# Altium PCB INA128仪放.PcbDoc
Units mil, origin at the board's own origin, x right, y up, seen from the top; angles counter-clockwise.
Board outline 2390.08 x 2410 mil, 2 copper layers (Top Layer, Bottom Layer); 27 components, 18 nets, 80 pads, 4 vias.
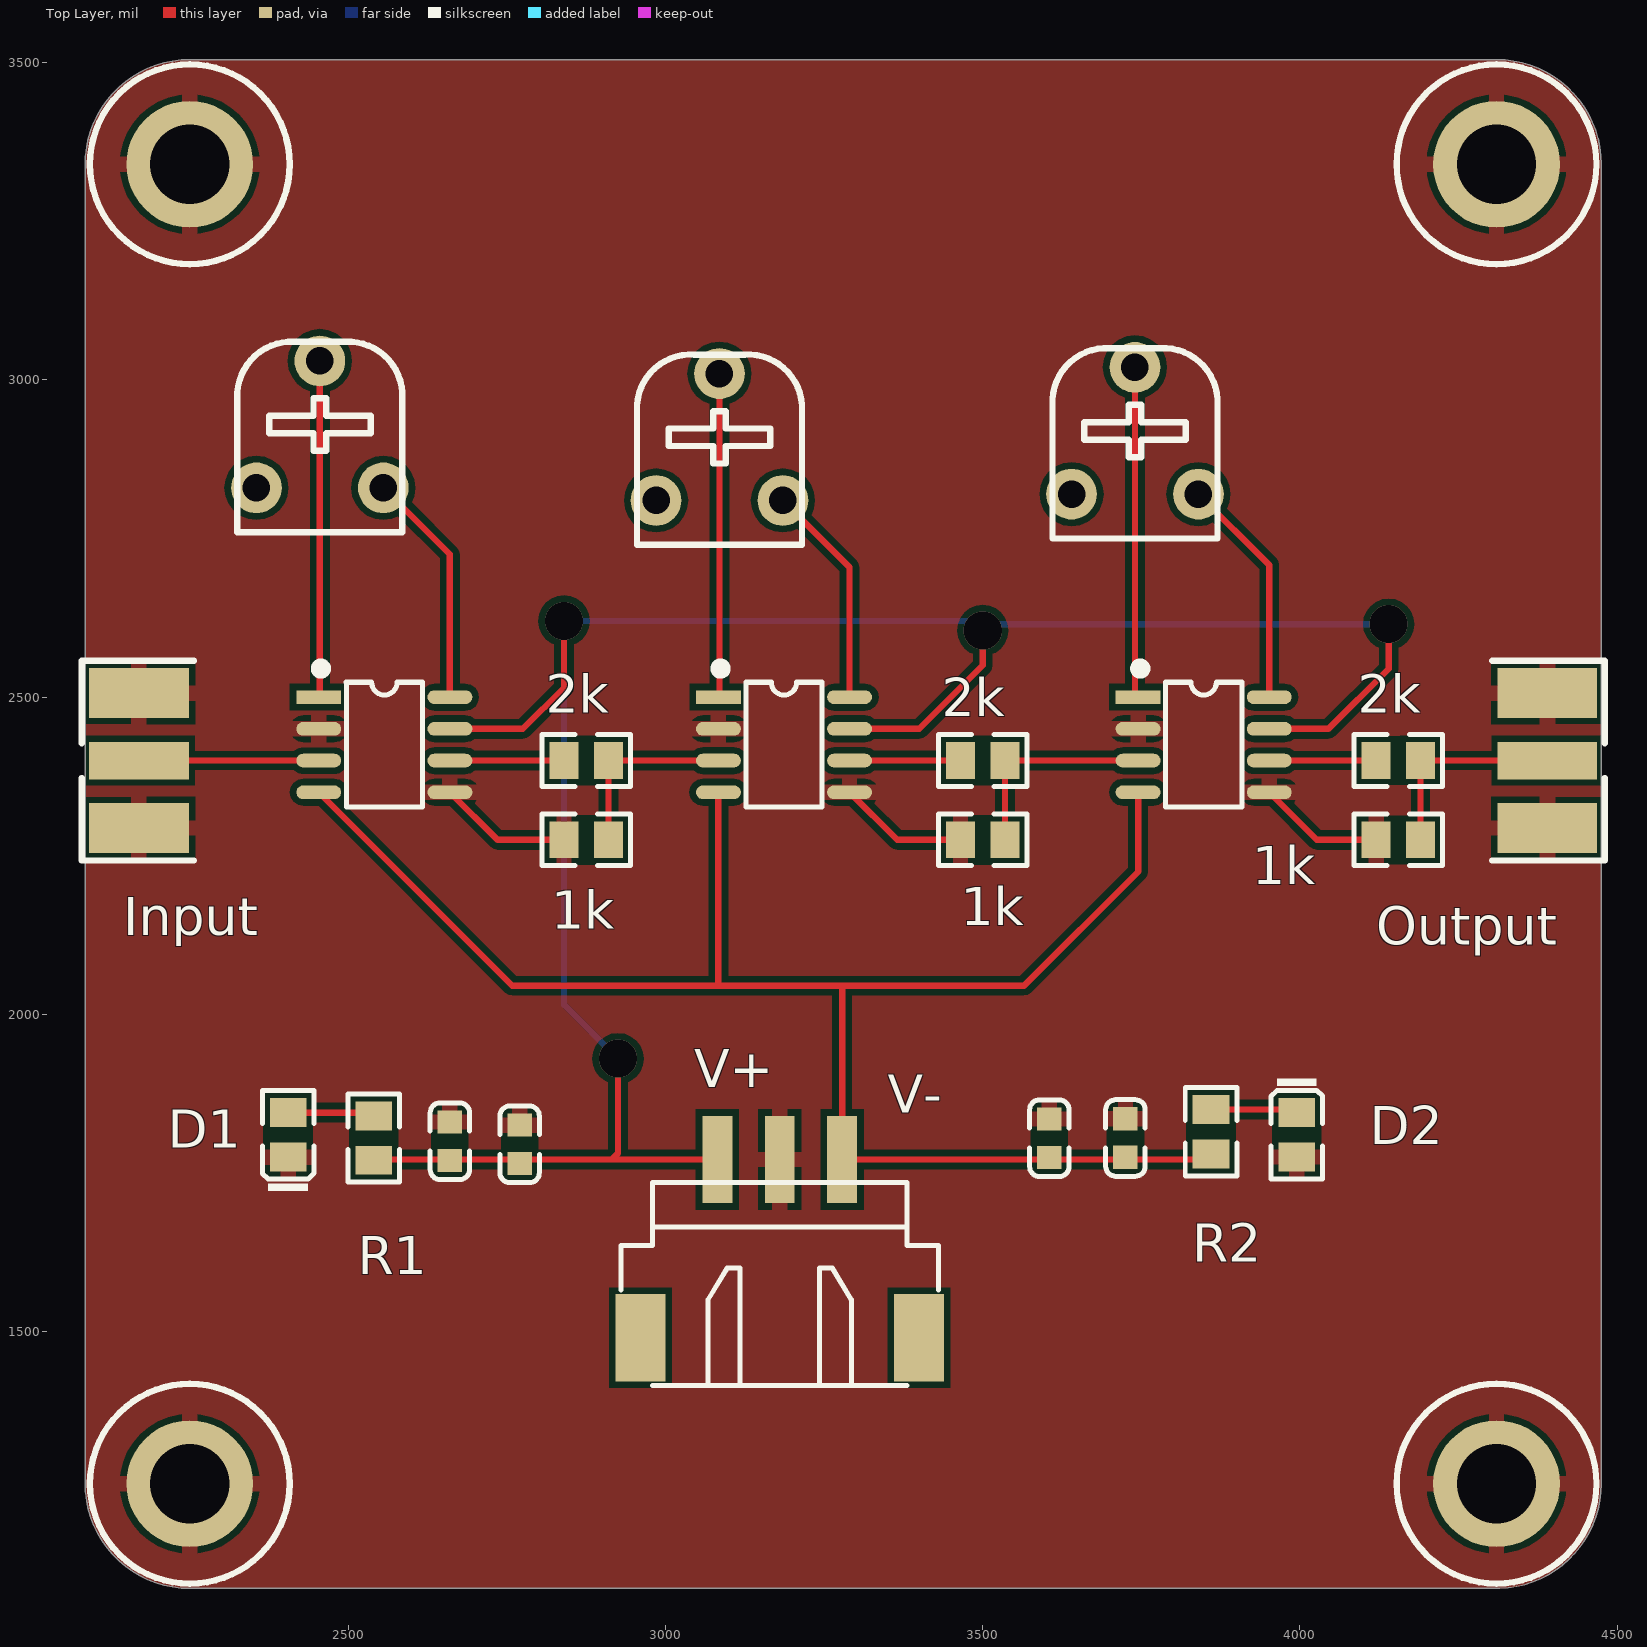
[diagram p0: Top Layer view]
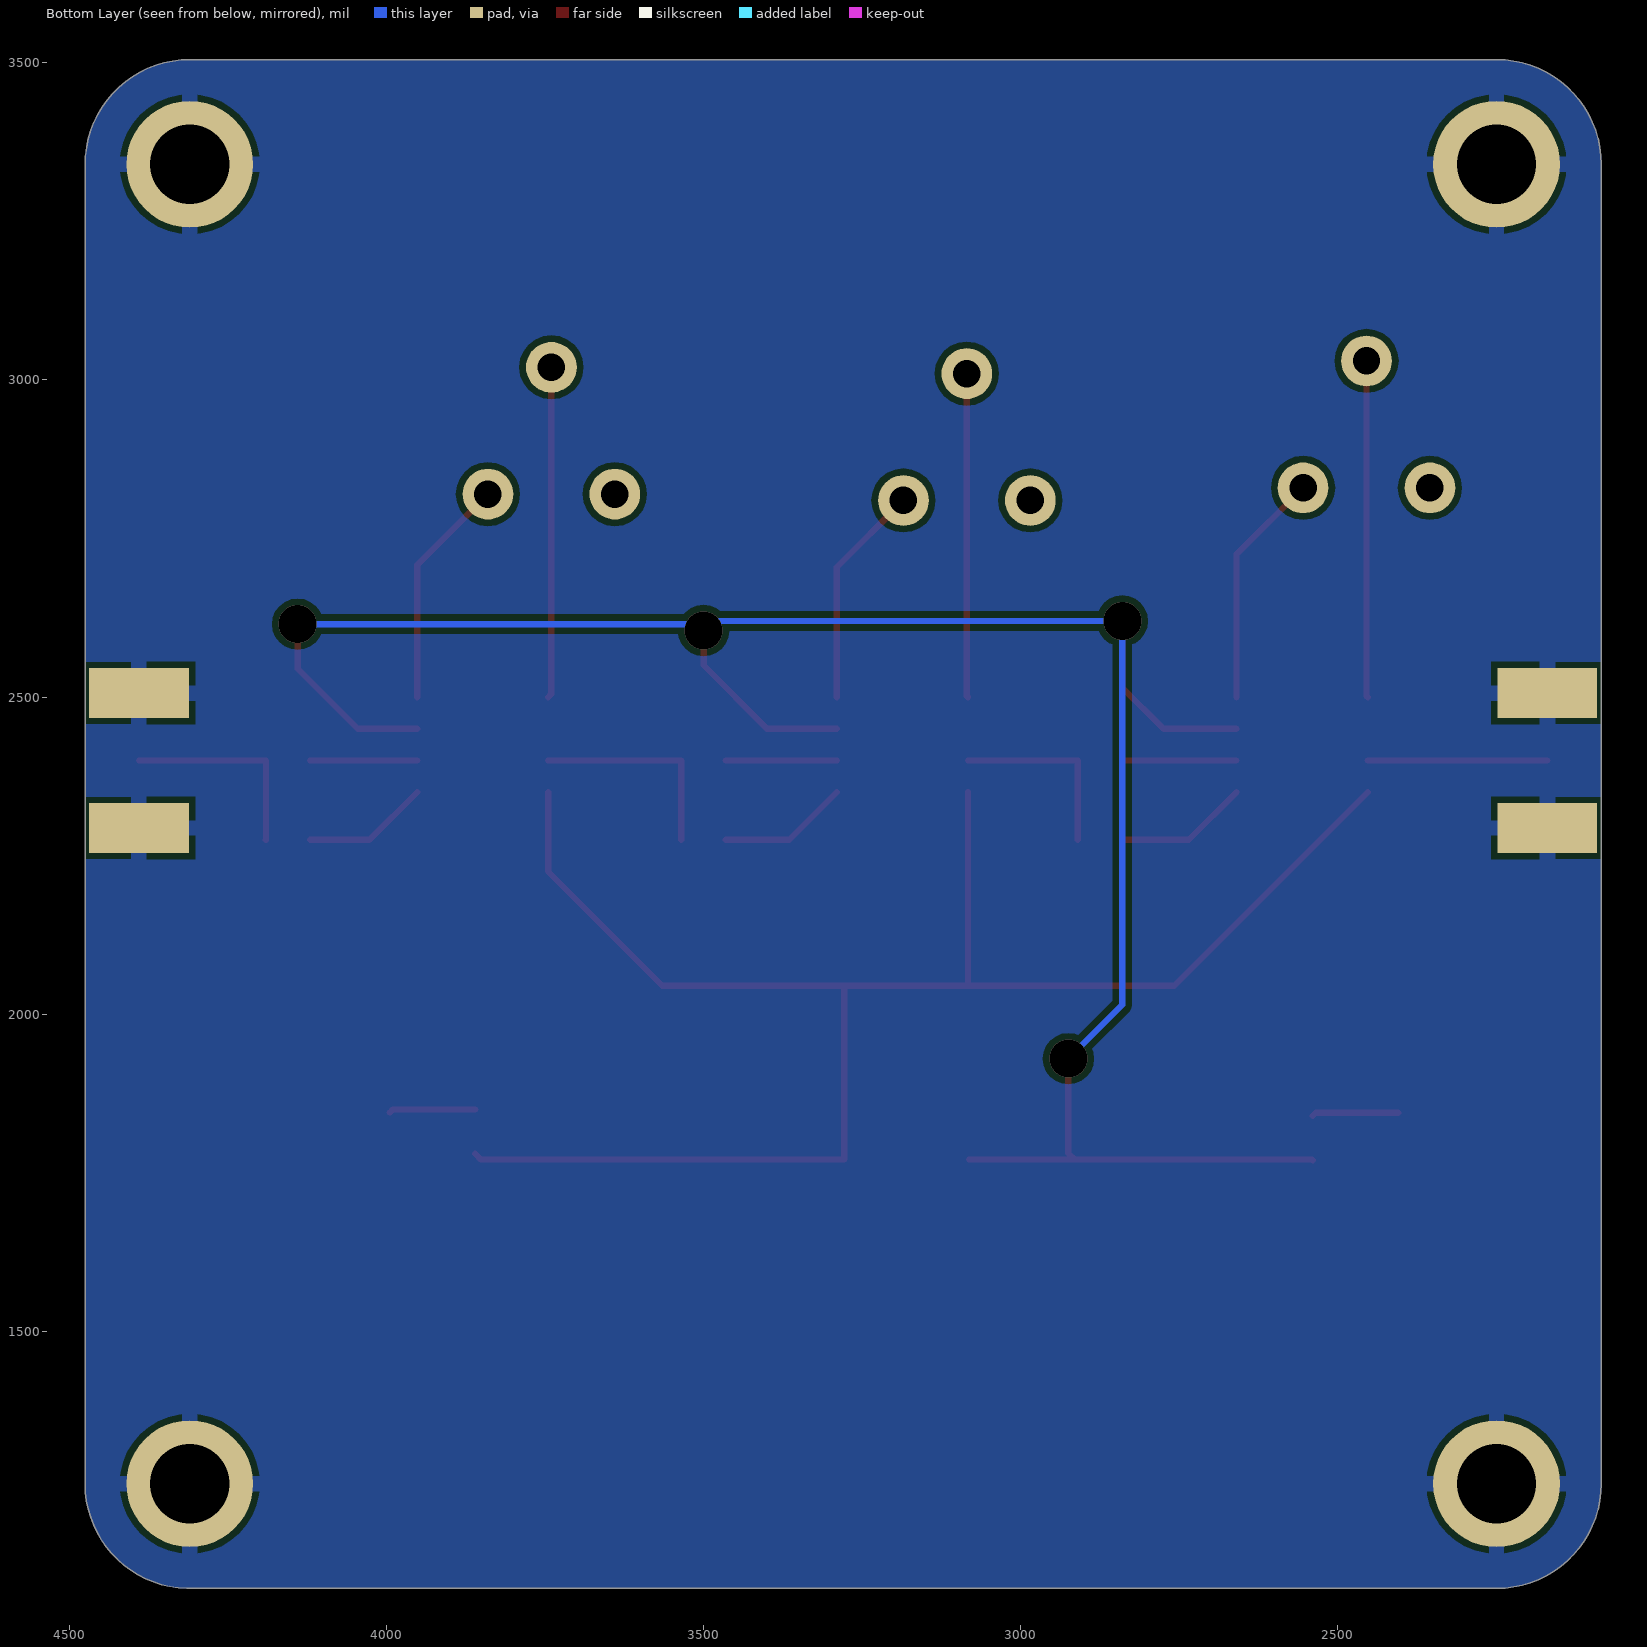
[diagram p1: Bottom Layer view, seen from below]
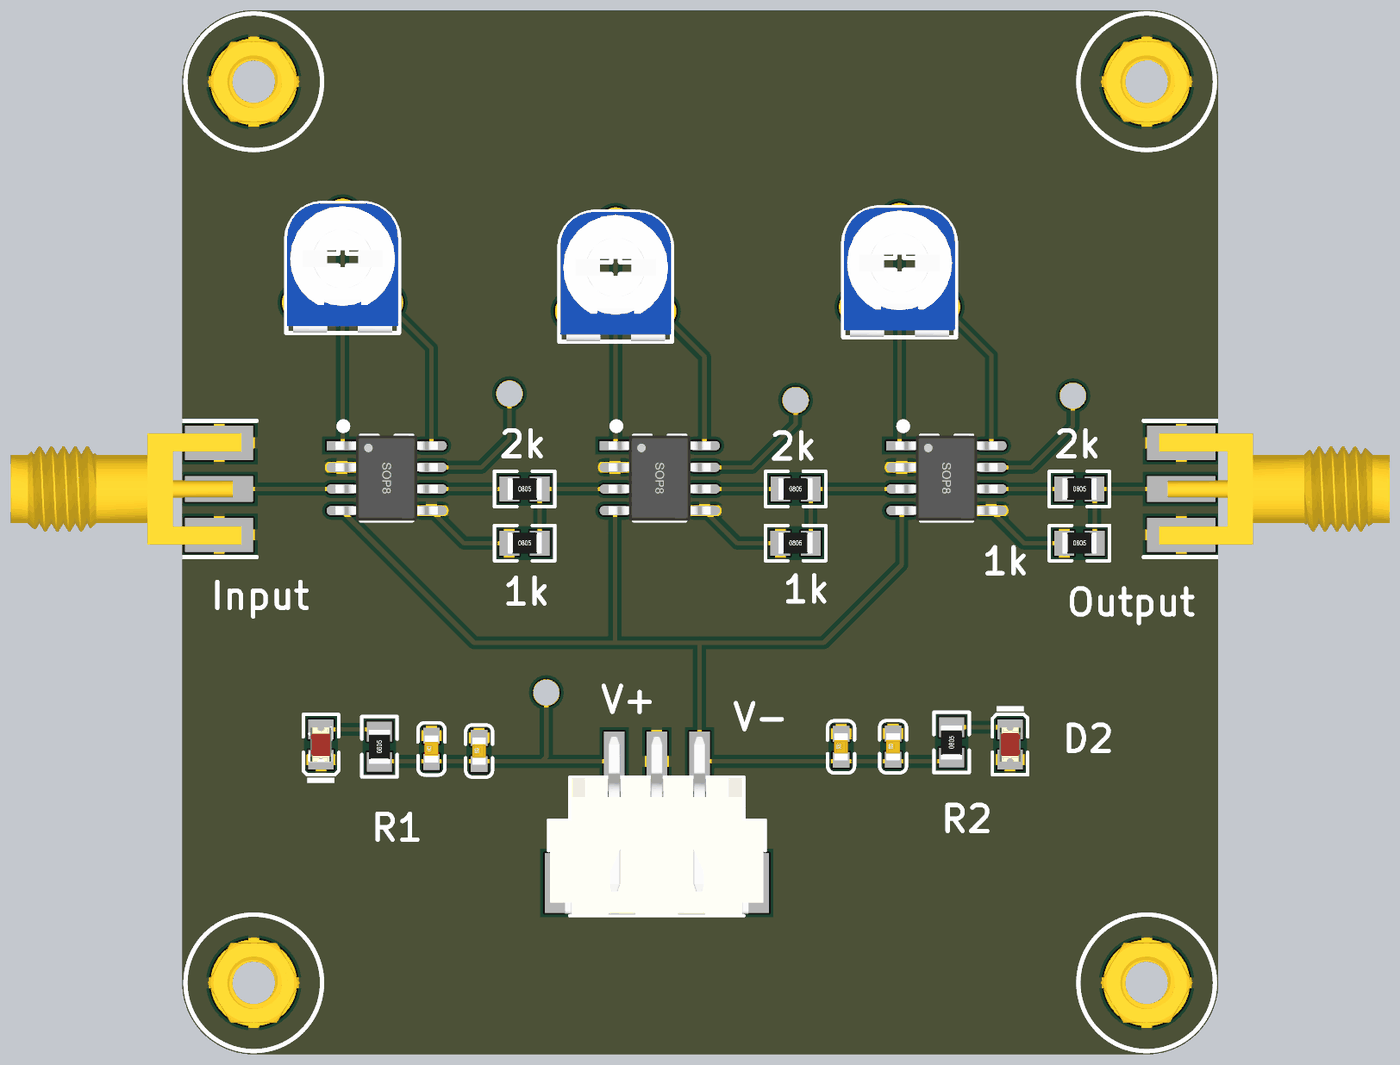
[diagram p2: 3D render of the assembled board from above, using the file's embedded part models]

## Layer stack, top to bottom
Top Solder: solder mask 0.4, Solder Resist, Dk 3.5
Top Layer: signal copper 1.4
Dielectric 1: dielectric 12.6, FR-4, Dk 4.8
Bottom Layer: signal copper 1.4
Bottom Solder: solder mask 0.4, Solder Resist, Dk 3.5

## Board outline
2085,1260 2085,3340 cw(c2250,3340) 2250,3505 4310,3505 cw(c4310,3340) 4475,3340 4475,1260 4475.08,1260 cw(c4310,1260) 4315,1095 2250,1095 cw(c2250,1260)

## Design rules (kind name [scope] priority, off if disabled: settings)
Clearance [All] p1: gap=10 ignorepadtopadclearanceinfootprint=FALSE except(0: Arc-Hole Track-Hole SMDPad-Hole THPad-Hole Via-Hole Fill-Hole Poly-Hole Region-Hole Text-Hole)
PolygonConnect [All] p1: connectstyle=Relief reliefconductorwidth=25 reliefentries=4 polygonreliefangle="90 Angle" airgapwidth=10
RoutingVias [All] p1: holewidth=28 width=50 viastyle="Through Hole" minholewidth=28 minwidth=50 maxholewidth=28 maxwidth=50
SolderMaskExpansion [All] p1: expansion=4
Width [All] p1: maxlimit=10 minlimit=10 preferedwidth=10
30 further rules are at their usual default settings.

## Classes and differential pairs
component class INA128仪放: 1k 2k D1 D2 Input Output R1 R2 V+ V- ""

## Components (designator, comment, footprint, x,y, rotation, side; value= is the part's Value field where it differs from the comment)
1k "1.5KΩ (1501) ±1%" 0805_R 2874.96,2275 r0 top (schematic designator R8)
1k "1.5KΩ (1501) ±1%" 0805_R 3499.96,2275 r0 top (schematic designator R7)
1k "1.5KΩ (1501) ±1%" 0805_R 4155.04,2275 r0 top (schematic designator R6)
2k "1.5KΩ (1501) ±1%" 0805_R 2874.96,2400 r0 top (schematic designator R5)
2k "1.5KΩ (1501) ±1%" 0805_R 3500.04,2400 r0 top (schematic designator R4)
2k "1.5KΩ (1501) ±1%" 0805_R 4154.96,2400 r0 top (schematic designator R3)
C1 "2.2nF (222) 10% 50V" 0603_C 2660,1800 r90 top
C3 "2.2nF (222) 10% 50V" 0603_C 3725,1805 r90 top
D1 "翠绿 0805" 0805_LED_S1 2405,1809.96 r90 top
D2 "翠绿 0805" 0805_LED_S1 3995,1810.04 r270 top
Input "SMA WIFI 天线接口" SMA-KE 2170,2400 r90 top (schematic designator JP1)
JP3 "HDR-1X3" XH2.54-WS-3P 3180,1575 r0 top
Output "SMA WIFI 天线接口" SMA-KE 4390,2400 r270 top (schematic designator JP2)
R1 "1.5KΩ (1501) ±1%" 0805_R 2540,1804.96 r90 top
R2 "1.5KΩ (1501) ±1%" 0805_R 3860,1814.96 r90 top
RP1 "10K" RM065 3740,3020 r0 top
RP2 "10K" RM065 3085,3010 r0 top
RP3 "10K" RM065 2455,3030 r0 top
SP1 "M3铜柱" M3x4_L 4310,1260 r0 top
SP2 "M3铜柱" M3x4_L 2250,3340 r0 top
SP3 "M3铜柱" M3x4_L 2250,1260 r0 top
SP4 "M3铜柱" M3x4_L 4310,3340 r0 top
U1 "INA128U" SOP8_N 3848.35,2425 r0 top
U2 "INA128U" SOP8_N 3186.65,2425 r0 top
U3 "INA128U" SOP8_N 2556.65,2425 r0 top
V+ "2.2nF (222) 10% 50V" 0603_C 2770,1795 r90 top (schematic designator C2)
V- "2.2nF (222) 10% 50V" 0603_C 3605,1804.68 r90 top (schematic designator C4)

## Footprints (in the part's own frame and the unit in brackets; to place one, negate y for a bottom-side part, rotate by r counter-clockwise, add the part's x,y. Pads: shape width x height; smd on the part's side, far side on the other; paste and mask are expansions set on the pad)
0603_C [mm]
  rect 0.93x0.98 smd: 1(-0.77,0) 2(0.77,0)
  silkscreen extent -1.53,-0.79 1.54,0.79, body extent -0.8,-0.4 0.8,0.4, height 0.3
0805_LED_S1 [mm]
  rect 1.16x1.47 smd: A(0.89,0) K(-0.89,0)
  silkscreen extent -2.24,-1.04 1.77,1.03, body extent -1.01,-0.62 1.01,0.62, height 1.1
0805_R [mm]
  rect 1.16x1.47 smd: 1(-0.89,0) 2(0.89,0)
  silkscreen extent -1.77,-1.04 1.77,1.03, body extent -1,-0.62 1,0.63, height 0.49
M3x4_L [mil] "M3铜柱，长：4mm"
  round 200 hole 125: 1(0,0)
  silkscreen extent -157,-157 157,157, body extent -106,-93 106,93, height 159
RM065 [mil] "蓝白可调电位器"
  round 80 hole 43.31: 1(-100,-200) 2(0,0) 3(100,-200)
  silkscreen extent -130,-270 130,30, body extent -128,-269 128,30, height 299
SMA-KE [mm]
  rect 1.5x4 smd: 1(0,0)
  rect 2x4 smd: 2(-2.7,0) 2(2.7,0)
  rect 2x4 smd far side: 3(-2.7,0) 3(2.7,0)
  silkscreen extent -4,-2.2 4,2.3, body extent -3.25,-1.3 3.25,12.2, height 3.75
SOP8_N [mm] "5*6*1.8mm（长宽高）"
  rect 1.8x0.55 smd: 1(-2.625,1.905)
  oval 1.8x0.55 smd: 2(-2.625,0.635) 3(-2.625,-0.635) 4(-2.625,-1.905) 5(2.625,-1.905) 6(2.625,-0.635) 7(2.625,0.635) 8(2.625,1.905)
  silkscreen extent -2.69,-2.5 1.52,3.2, body extent -3,-2.5 3,2.5, height 1.9
XH2.54-WS-3P [mm] "长：12.5mm，宽：8mm，高：6.1mm"
  rect 2x3.5 smd: 0(-5.577,-2.15) 0(5.577,-2.15)
  rect 1.2x3.5 smd: 1(-2.5,4.981) 2(0,4.981) 3(2.5,4.981)
  silkscreen extent -6.35,-4.06 6.35,4.06, body extent -6.25,-4 6.25,6.42, height 6.05

## Part data
1k 1k 1k 2k 2k 2k R1 R2: library part "0805 1.5KΩ (1501) 1%", "贴片电阻", Package=0805, SuppliersPartNumber=C4310, ComponentLink1Description=供应商链接, ComponentLink1URL=http://www.szlcsc.com/product/details_4717.html, Supplier=LC
C1 C3 V+ V-: library part "0603 2.2nF (222) 10% 50V", "贴片电容", Package=0603, SuppliersPartNumber=C1604, ComponentLink1Description=供应商链接, ComponentLink1URL=http://www.szlcsc.com/product/details_1956.html, Supplier=LC
D1 D2: library part "0805 翠绿", "发光二极管", Package=0805, SuppliersPartNumber=C2297, ComponentLink1Description=供应商链接, ComponentLink1URL=http://www.szlcsc.com/product/details_2670.html, Supplier=LC
Input Output: library part SMA, "SMA-2.4G射频天线接口", BOM名称=SMA-2.4G射频天线接口
JP3: library part "Header 3", "3P接插件", BOM名称=3P接插件
RP1 RP2 RP3: library part RP-ID, "插件单联电位器"
SP1 SP2 SP3 SP4: library part 铜柱小焊盘, "铜柱"
U1 U2 U3: library part CMP-0992-00017-2, "Precision, Low Power Instrumentation Amplifier, -40 to 85 degC, 8-pin SOIC (D8), Green (RoHS & no Sb/Br)", Input Bias Current (+/-)(Max)(nA)=5, Manufacturer="Texas Instruments", Quiescent Current (+/-)(Typ)(mA)=0.7, CMRR(Min)(dB)=120, Code_JEDEC=MS-012, ComponentLink1Description="Manufacturer URL", ComponentLink1URL=http://www.ti.com/, ComponentLink2Description=Datasheet, ComponentLink2URL=http://www.ti.com/general/docs/lit/getliterature.tsp?genericPartNumber=INA128&fileType=pdf, ComponentLink3Description="Package Specification", ComponentLink3URL=http://www.ti.com/litv/pdf/msoi002j, DatasheetVersion=SBOS051B, Eco-Plan="Green (RoHS & no Sb/Br)", Gain(V/V)="1 to 10000", Input Offset (+/-)(Max)(uV)=50, Input Offset Drift (+/-)(Max)(uV/Degrees Celsius)=0.5, Manufacturer Part Number=INA128U, Mounting Technology="Surface Mount", Noise at 1kHz(Typ)(nV/rt(Hz))=8, Non-Linearity (+/-)(Max)(%)=0.002, Number of Channels=1, PackageDescription="8-Pin Plastic Small Outline, Body 4.9 x 3.9 mm, Pitch 1.27 mm", PackageReference=D0008A, PackageVersion="4040047-3/M, 06/2011", PartNumber=INA128U, SubFamily="Dual Supply", Vs(Max)(V)=36, Vs(Min)(V)=4.5

## Via types
v1: diameter 60, hole 60, Top Layer to Bottom Layer, 4 vias

## Nets (pads, with @x,y where several pads share a name; then routed paths per layer and width w, separated by ;. In a path a pad name is that pad's centre, name@x,y a point inside that pad or via, vN(x,y) a via of type N, cw(c..) or ccw(c..) an arc to the next point about the centre after c; other vN are vias at no path point)
+5: C1.1 JP3.1 R1.1 U1.7 U2.7 U3.7 V+.1 | length 3656.7
  Top Layer w10: R1.1 2541.18,1771.1 2915,1771.1 ; U3.7 2775,2450 2840,2515 v1(2840,2620) ; v1(2925,1930) 2925,1781.1 2915,1771.1 ; JP3.1 2915,1771.1 ; U2.7 3400,2450 3500,2550 v1(3500,2605) ; U1.7 4045,2450 4140,2545 v1(4140,2615)
  Bottom Layer w10: v1(2925,1930) 2840,2015 v1(2840,2620) 3485,2620 v1(3500,2605) 3510,2615 v1(4140,2615)
-5: C3.1 JP3.3 R2.1 U1.4 U2.4 U3.4 V-.1 | length 2783.8
  Top Layer w10: U3.4 2758.31,2045 3085,2045 ; U2.4 3083.31,2046.69 3085,2045 ; U1.4 3745,2225 3565,2045 3275,2045 ; R2.1 3851.18,1771.1 JP3.3 3278.43,2041.57 3275,2045 ; 3085,2045 3275,2045
GND: 1k.1 C1.2 C3.2 D1.K D2.A Input.2 Input.3 JP3.2 Output.2 Output.3 SP1.1 SP2.1 SP3.1 SP4.1 U1.2 U1.5 U2.2 U2.5 U3.2 U3.5 V+.2 V-.2 | length 616.3
  Top Layer w10: U3.5 2735,2275 1k.1@2839.92,2275 ; U2.5 3365,2275 1k.1@3464.92,2275 ; U1.5 4026.69,2275 1k.1@4120,2275
IN: Input.1 U3.3 | length 283.3
  Top Layer w10: Input.1 U3.3
NetD1_A: D1.A R1.2 | length 137.1
  Top Layer w10: D1.A 2535,1845 R1.2
NetD2_K: D2.K R2.2 | length 137
  Top Layer w10: R2.2 3990.08,1850 D2.K
NetR3_1: 2k.1@4119.92,2400 U1.6 | length 168.2
  Top Layer w10: U1.6 2k.1@4119.92,2400
NetR4_1: 2k.1@3465,2400 U2.6 | length 175
  Top Layer w10: U2.6 2k.1@3465,2400
NetR4_2: 1k.2@3535,2275 2k.2@3535.08,2400 U1.3 | length 335
  Top Layer w10: 1k.2@3535,2275 3535.08,2275.08 3535.08,2400 U1.3
NetR5_1: 2k.1@2839.92,2400 U3.6 | length 179.9
  Top Layer w10: U3.6 2k.1@2839.92,2400
NetR5_2: 1k.2@2910,2275 2k.2@2910,2400 U2.3 | length 298.3
  Top Layer w10: 1k.2@2910,2275 2910,2400 U2.3
NetRP1_2: RP1.2 U1.1 | length 522.1
  Top Layer w10: RP1.2 3740,2505 U1.1
NetRP1_3: RP1.3 U1.8 | length 366.3
  Top Layer w10: RP1.3 3951.69,2708.31 U1.8
NetRP2_2: RP2.2 U2.1 | length 510.7
  Top Layer w10: U2.1 3085,2501.69 RP2.2
NetRP2_3: RP2.3 U2.8 | length 353.5
  Top Layer w10: RP2.3 3290,2705 U2.8
NetRP3_2: RP3.2 U3.1 | length 530.7
  Top Layer w10: U3.1 2455,2501.69 RP3.2
NetRP3_3: RP3.3 U3.8 | length 373.5
  Top Layer w10: RP3.3 2660,2725 U3.8
OUT: 1k.2@4190.08,2275 2k.2@4190,2400 Output.1 | length 325
  Top Layer w10: 1k.2@4190.08,2275 4190,2275.08 4190,2400 Output.1
pads on no net: JP3.0 RP1.1 RP2.1 RP3.1

## Polygon pours and split planes (outlines as drawn)
GND on Top Layer "Top Layer-No Net" (solid, pour order 2): 2085,1260 2085,3340 cw(c2250,3340) 2250,3505 4310,3505 cw(c4310,3340) 4475,3340 4475,1260 4475.08,1260 cw(c4310,1260) 4315,1095 2250,1095 cw(c2250,1260)
GND on Bottom Layer "Top Layer-No Net1" (solid, pour order 3): 2085,1260 2085,3340 cw(c2250,3340) 2250,3505 4310,3505 cw(c4310,3340) 4475,3340 4475,1260 4475.08,1260 cw(c4310,1260) 4315,1095 2250,1095 cw(c2250,1260)

## Silkscreen, mask and mechanical layers (free items; w line width, h text height)
Mechanical 1:
  lines w10: 4475,1260 4475,3340 ccw(c4310,3340) 4310,3505 2250,3505 ccw(c2250,3340) 2085,3340 2085,1260 ccw(c2250,1260) 2250,1095 4315,1095 ccw(c4310,1260) 4475.08,1260